# EAGLE board CT_schematic (EAGLE 7.6.0)

Size 100 x 80 mm. Coordinates in mm from the lower left corner, seen from the top.
Outline: 0,0 100,0 100,80 0,80 0,0
Copper layers (1*16): Top 0.035mm / dielectric 1.5mm / Bottom 0.035mm
Design rules "default": minimum track width 10mil, minimum drill 24mil, track to track 8mil, track to pad 8mil, pad to pad 8mil, via to via 8mil, smd to smd 8mil, copper to edge 40mil, drill to drill 8mil, minimum pad ring 10mil, minimum via ring 8mil, stop-mask expansion 4mil, vias tented up to drill 0mil, thermal gap 10mil

## Footprints (pad centres in the part's own frame; a part is rotated, then mirrored left to right if it is on the bottom)
C0603 = smd 0.8 x 0.8: 1 -0.762,0; 2 0.762,0
C0402 = smd 0.5 x 0.5: 1 -0.508,0; 2 0.508,0
C0805 = smd 1.2 x 1.3: 1 -1.016,0; 2 1.016,0
C1210 = smd 1.2 x 2.5: 1 -1.524,0; 2 1.524,0
EXV-9H = smd 3.505 x 1.676: 1 -2.857,0; 2 2.857,0
L0603 = smd 0.8 x 0.8: 1 -0.762,0; 2 0.762,0
PJ-037B_PACKAGE = drill 3.7 square: 1 12,0 | drill 3.2 square: 2 6,0
R0603 = smd 0.8 x 0.8: 1 -0.762,0; 2 0.762,0
LQFP48 = smd 0.3 x 1.2: 1 -2.75,-4.25; 2 -2.25,-4.25; 3 -1.75,-4.25; 4 -1.25,-4.25; 5 -0.75,-4.25; 6 -0.25,-4.25; 7 0.25,-4.25; 8 0.75,-4.25; 9 1.25,-4.25; 10 1.75,-4.25; 11 2.25,-4.25; 12 2.75,-4.25; 25 2.75,4.25; 26 2.25,4.25; 27 1.75,4.25; 28 1.25,4.25; 29 0.75,4.25; 30 0.25,4.25; 31 -0.25,4.25; 32 -0.75,4.25; 33 -1.25,4.25; 34 -1.75,4.25; 35 -2.25,4.25; 36 -2.75,4.25 | smd 1.2 x 0.3: 13 4.25,-2.75; 14 4.25,-2.25; 15 4.25,-1.75; 16 4.25,-1.25; 17 4.25,-0.75; 18 4.25,-0.25; 19 4.25,0.25; 20 4.25,0.75; 21 4.25,1.25; 22 4.25,1.75; 23 4.25,2.25; 24 4.25,2.75; 37 -4.25,2.75; 38 -4.25,2.25; 39 -4.25,1.75; 40 -4.25,1.25; 41 -4.25,0.75; 42 -4.25,0.25; 43 -4.25,-0.25; 44 -4.25,-0.75; 45 -4.25,-1.25; 46 -4.25,-1.75; 47 -4.25,-2.25; 48 -4.25,-2.75
SSOP-28 = smd 1.5 x 0.4: 1 -3.625,4.225; 2 -3.625,3.575; 3 -3.625,2.925; 4 -3.625,2.275; 5 -3.625,1.625; 6 -3.625,0.975; 7 -3.625,0.325; 8 -3.625,-0.325; 9 -3.625,-0.975; 10 -3.625,-1.625; 11 -3.625,-2.275; 12 -3.625,-2.925; 13 -3.625,-3.575; 14 -3.625,-4.225; 15 3.625,-4.225; 16 3.625,-3.575; 17 3.625,-2.925; 18 3.625,-2.275; 19 3.625,-1.625; 20 3.625,-0.975; 21 3.625,-0.325; 22 3.625,0.325; 23 3.625,0.975; 24 3.625,1.625; 25 3.625,2.275; 26 3.625,2.925; 27 3.625,3.575; 28 3.625,4.225
FCI_10118193-0001LF = smd 0.4 x 1.35: 1 -1.3,2.675; 2 -0.65,2.675; 3 0,2.675; 4 0.65,2.675; 5 1.3,2.675 | smd 1.6 x 1.4: 6 -3.2,2.45; 7 3.2,2.45 | smd 1.9 x 1.9: 8 -1.2,0; 9 1.2,0 | hole 0.5: -3.3,0; 3.3,0
SOIC-8 = smd 1.6 x 0.6: 1 -2.7,1.905 | smd 1.55 x 0.6: 2 -2.7,0.635; 3 -2.7,-0.635; 4 -2.7,-1.905; 5 2.7,-1.905; 6 2.7,-0.635; 7 2.7,0.635; 8 2.7,1.905
182-009-MALE = drill 1.194 pad 1.524 octagon: 1 -5.537,10.923; 2 -2.769,10.923; 3 0,10.923; 4 2.769,10.923; 5 5.537,10.923; 6 -4.153,8.08; 7 -1.384,8.08; 8 1.384,8.08; 9 4.153,8.08 | hole 3.048: -12.446,9.501; 12.446,9.501
ABLS-25.000MHZ-B2F-T = smd 5.6 x 2.8: 1 -3.81,0; 2 5.69,0
ABLS-12.000MHZ-B4-T = smd 5.6 x 2.8: 1 0,0; 2 9.5,0
ASEK = smd 1.4 x 1: 1 -1.1,-0.8; 2 1.1,-0.8; 3 1.1,0.8; 4 -1.1,0.8
WSON-8 = smd 0.3 x 0.6: 1 -0.75,0; 2 0.05,0; 3 0.85,0; 4 1.65,0; 5 1.65,3.8; 6 0.85,3.8; 7 0.05,3.8; 8 -0.75,3.8 | smd 3 x 2.6: PAD 0.45,1.9
SON-6 = smd 0.55 x 0.3: 1 -0.355,0.5 | smd 0.52 x 0.3: 2 -0.37,0; 3 -0.37,-0.5; 4 0.37,-0.5; 5 0.37,0; 6 0.37,0.5
SW_4-1437565-2 = smd 1.4 x 2.1: 1 -2.23,4.55; 2 -2.23,-4.55; 3 2.23,4.55; 4 2.23,-4.55
LGM67K-G1J2-24-Z = smd 0.8 x 1.4: A -2,0; C 0,0
NC7SZ125M5X = smd 1.3 x 0.7: 1 -1.3,0.95; 2 -1.3,0; 3 -1.3,-0.95; 4 1.3,-0.95; 5 1.3,0.95
DUMMY_PACKAGE_117 = drill 0.3: 1 0,-1; 2 1.5,-1; 3 3,-1

## Placement (x,y rotation side)
C1  1e-06  [C0603]  -27.94,69.85 0 top  (outside the outline)
C2  1e-07  [C0603]  -31.75,69.85 0 top  (outside the outline)
C3  1e-07  [C0603]  -35.56,69.85 0 top  (outside the outline)
C4  1e-07  [C0603]  -39.37,69.85 0 top  (outside the outline)
C5  1e-07  [C0603]  -43.18,69.85 0 top  (outside the outline)
C6  1e-07  [C0603]  -46.99,69.85 0 top  (outside the outline)
C7  4.7e-06  [C0603]  -24.13,69.85 0 top  (outside the outline)
C8  1e-08  [C0603]  -50.8,69.85 0 top  (outside the outline)
C9  1e-06  [C0603]  -54.61,69.85 0 top  (outside the outline)
C10  1e-11  [C0402]  -34.29,74.93 0 top  (outside the outline)
C11  1e-11  [C0402]  -38.1,74.93 0 top  (outside the outline)
C12  1e-07  [C0402]  -41.91,74.93 0 top  (outside the outline)
C13  4.7e-06  [C0805]  -27.94,63.5 0 top  (outside the outline)
C14  1e-07  [C0402]  -45.72,74.93 0 top  (outside the outline)
C15  1e-07  [C0402]  -49.53,74.93 0 top  (outside the outline)
C16  1e-07  [C0402]  -53.34,74.93 0 top  (outside the outline)
C17  1e-08  [C0402]  -57.15,74.93 0 top  (outside the outline)
C18  1e-08  [C0402]  -60.96,74.93 0 top  (outside the outline)
C19  1e-05  [C1210]  -69.85,57.15 0 top  (outside the outline)
C20  1e-05  [C1210]  -16.51,63.5 0 top  (outside the outline)
C21  1e-07  [C0402]  -64.77,74.93 0 top  (outside the outline)
C22  0.0001  [EXV-9H]  -38.1,49.53 0 top  (outside the outline)
C23  0.0001  [EXV-9H]  -49.53,49.53 0 top  (outside the outline)
C24  1e-08  [C0402]  -68.58,74.93 0 top  (outside the outline)
F1  240.0  [L0603]  -58.42,69.85 0 top  (outside the outline)
J1  PJ-037B  [PJ-037B_PACKAGE]  -27.94,29.21 0 top  (outside the outline)
R1  10000.0  [R0603]  -53.34,63.5 0 top  (outside the outline)
R2  1000.0  [R0603]  -62.23,69.85 0 top  (outside the outline)
R3  1600.5  [R0603]  -66.04,69.85 0 top  (outside the outline)
R4  4700.0  [R0603]  -69.85,69.85 0 top  (outside the outline)
R5  10000.0  [R0603]  -58.42,63.5 0 top  (outside the outline)
R6  4700.0  [R0603]  -15.24,74.93 0 top  (outside the outline)
R7  10000.0  [R0603]  -63.5,63.5 0 top  (outside the outline)
R8  10000.0  [R0603]  -68.58,63.5 0 top  (outside the outline)
R9  120.0  [R0603]  -19.05,74.93 0 top  (outside the outline)
R10  100000.0  [R0603]  -33.02,63.5 0 top  (outside the outline)
R11  100000.0  [R0603]  -38.1,63.5 0 top  (outside the outline)
R12  2231.0  [R0603]  -22.86,74.93 0 top  (outside the outline)
R13  1000.0  [R0603]  -26.67,74.93 0 top  (outside the outline)
R14  10000.0  [R0603]  -15.24,69.85 0 top  (outside the outline)
R15  10000.0  [R0603]  -20.32,69.85 0 top  (outside the outline)
R16  9100.0  [R0603]  -30.48,74.93 0 top  (outside the outline)
R17  680000.0  [R0603]  -43.18,63.5 0 top  (outside the outline)
R18  120000.0  [R0603]  -48.26,63.5 0 top  (outside the outline)
U1  STM32F303C8T6  [LQFP48]  -59.69,27.94 0 top  (outside the outline)
U2  FT232RL-REEL  [SSOP-28]  -60.96,7.62 0 top  (outside the outline)
U3  10118193-0001LF  [FCI_10118193-0001LF]  -50.8,39.37 0 top  (outside the outline)
U4  SN65HVD230D  [SOIC-8]  -21.59,40.64 0 top  (outside the outline)
U5  182-009-113R531  [182-009-MALE]  -36.83,6.35 0 top  (outside the outline)
U6  ABLS-25.000MHZ-B2F-T  [ABLS-25.000MHZ-B2F-T]  -26.67,57.15 0 top  (outside the outline)
U7  ABLS-12.000MHZ-B4-T  [ABLS-12.000MHZ-B4-T]  -50.8,57.15 0 top  (outside the outline)
U8  ASEK-32.768KHz-ECST  [ASEK]  -29.21,49.53 0 top  (outside the outline)
U9  LP3878SDX-ADJ/NOPB  [WSON-8]  -43.18,39.37 0 top  (outside the outline)
U10  TPS3895ADRYR  [SON-6]  -20.32,78.74 0 top  (outside the outline)
U11  4-1437565-2  [SW_4-1437565-2]  -44.45,27.94 0 top  (outside the outline)
U12  Q65110A2395  [LGM67K-G1J2-24-Z]  -58.42,57.15 0 top  (outside the outline)
U13  nc7sz125m5x  [NC7SZ125M5X]  -21.59,63.5 0 top  (outside the outline)
U14  Dummy  [DUMMY_PACKAGE_117]  -17.78,80.01 0 top  (outside the outline)

## Library data of the parts
C1-C24 F1 J1 R1-R18 U1-U14 = circuit_tree

## Nets
CLK_CRYSTAL_U1_5: C10.1 U1.5 U6.1
CLK_CRYSTAL_U1_6: C11.1 U1.6 U6.2
CLK_CRYSTAL_U2_27: U2.27 U7.1
CLK_CRYSTAL_U2_28: U2.28 U7.2
CLK_U1_3: U1.3 U8.3
GND: C1.2 C2.2 C3.2 C4.2 C5.2 C6.2 C7.2 C8.2 C9.2 C10.2 C11.2 C12.2 C13.2 C14.2 C15.2 C16.2 C17.2 C18.2 C19.2 C20.2 C21.2 C22.2 C23.2 C24.2 J1.2 R2.2 R5.2 R8.2 R10.2 R13.2 R16.2 R18.2 U1.8 U1.23 U1.35 U1.47 U2.7 U2.18 U2.21 U2.25 U2.26 U3.5 U3.6 U3.7 U3.8 U3.9 U4.2 U5.5 U8.2 U9.3 U9.PAD U10.2 U12.C U13.1 U13.3 U14.1
NET_U1_7: R4.1 U1.7 U13.4
NET_U1_9: C8.1 C9.1 F1.1 U1.9
NET_U1_42: R3.1 U1.42 U12.A
NET_U1_43: R1.1 U1.43 U11.3 U11.4
NET_U1_44: R5.1 U1.44
NET_U2_14: R7.1 U2.14
NET_U2_17: C14.1 U2.17
NET_U2_19: R8.1 U2.19
NET_U3_1: R6.1 U3.1
NET_U3_2: U2.16 U3.2
NET_U3_3: U2.15 U3.3
NET_U3_19: R6.2
NET_U4_6: R9.2 U4.6
NET_U4_8: R10.1 U4.8
NET_U5_2: R9.2 U4.6 U5.2
NET_U5_3: R9.1 U4.7 U5.3
NET_U9_1: C18.1 U9.1
NET_U9_6: R12.2 R13.1 U9.6
NET_U9_8: R11.1 U9.8
NET_U10_1: R15.1 R16.1 U10.1
NET_U10_3: R17.2 R18.1 U10.3
NET_U10_4: R14.1 U10.4 U13.2
NET_U11_1: R2.1 U11.1 U11.2
PROC_CAN_RX: U1.45 U4.4
PROC_CAN_TX: U1.46 U4.1
PROC_TIM1_CH1: U1.29 U14.3
PROC_TIM1_CH2N: U1.18 U14.2
PROC_USART1_CTS: U1.32 U2.3
PROC_USART1_RTS: U1.33 U2.11
PROC_USART1_RX: U1.31 U2.1
PROC_USART1_TX: U1.30 U2.5
VCC_S1_11V5: C19.1 C22.1 C23.1 J1.1 R11.2 U9.4
VCC_TIER1_3V3: C1.1 C2.1 C3.1 C4.1 C5.1 C6.1 C7.1 C12.1 C13.1 C15.1 C16.1 C17.1 C20.1 C21.1 C24.1 F1.2 R1.2 R3.2 R4.2 R7.2 R12.1 R14.2 R15.2 R17.1 U1.1 U1.24 U1.36 U1.48 U2.4 U2.20 U4.3 U8.4 U9.5 U10.6 U13.5

## Tracks (layer width: path | path; a pad name or v marks a point on that pad's centre or on a via)
CLK_CRYSTAL_U1_5  (2 unrouted)
CLK_CRYSTAL_U1_6  (2 unrouted)
CLK_CRYSTAL_U2_27  (1 unrouted)
CLK_CRYSTAL_U2_28  (1 unrouted)
CLK_U1_3  (1 unrouted)
GND  (55 unrouted)
NET_U1_7  (2 unrouted)
NET_U1_9  (3 unrouted)
NET_U1_42  (2 unrouted)
NET_U1_43  (3 unrouted)
NET_U1_44  (1 unrouted)
NET_U2_14  (1 unrouted)
NET_U2_17  (1 unrouted)
NET_U2_19  (1 unrouted)
NET_U3_1  (1 unrouted)
NET_U3_2  (1 unrouted)
NET_U3_3  (1 unrouted)
NET_U4_6  (1 unrouted)
NET_U4_8  (1 unrouted)
NET_U5_2  (2 unrouted)
NET_U5_3  (2 unrouted)
NET_U9_1  (1 unrouted)
NET_U9_6  (2 unrouted)
NET_U9_8  (1 unrouted)
NET_U10_1  (2 unrouted)
NET_U10_3  (2 unrouted)
NET_U10_4  (2 unrouted)
NET_U11_1  (2 unrouted)
PROC_CAN_RX  (1 unrouted)
PROC_CAN_TX  (1 unrouted)
PROC_TIM1_CH1  (1 unrouted)
PROC_TIM1_CH2N  (1 unrouted)
PROC_USART1_CTS  (1 unrouted)
PROC_USART1_RTS  (1 unrouted)
PROC_USART1_RX  (1 unrouted)
PROC_USART1_TX  (1 unrouted)
VCC_S1_11V5  (5 unrouted)
VCC_TIER1_3V3  (34 unrouted)